# Altium PCB 8button-8neopixel.PcbDoc
Units mil, origin at the board's own origin, x right, y up, seen from the top; angles counter-clockwise.
Board outline 7950 x 3500 mil, 2 copper layers (Top Layer, Bottom Layer); 25 components, 18 nets, 72 pads, 0 vias.
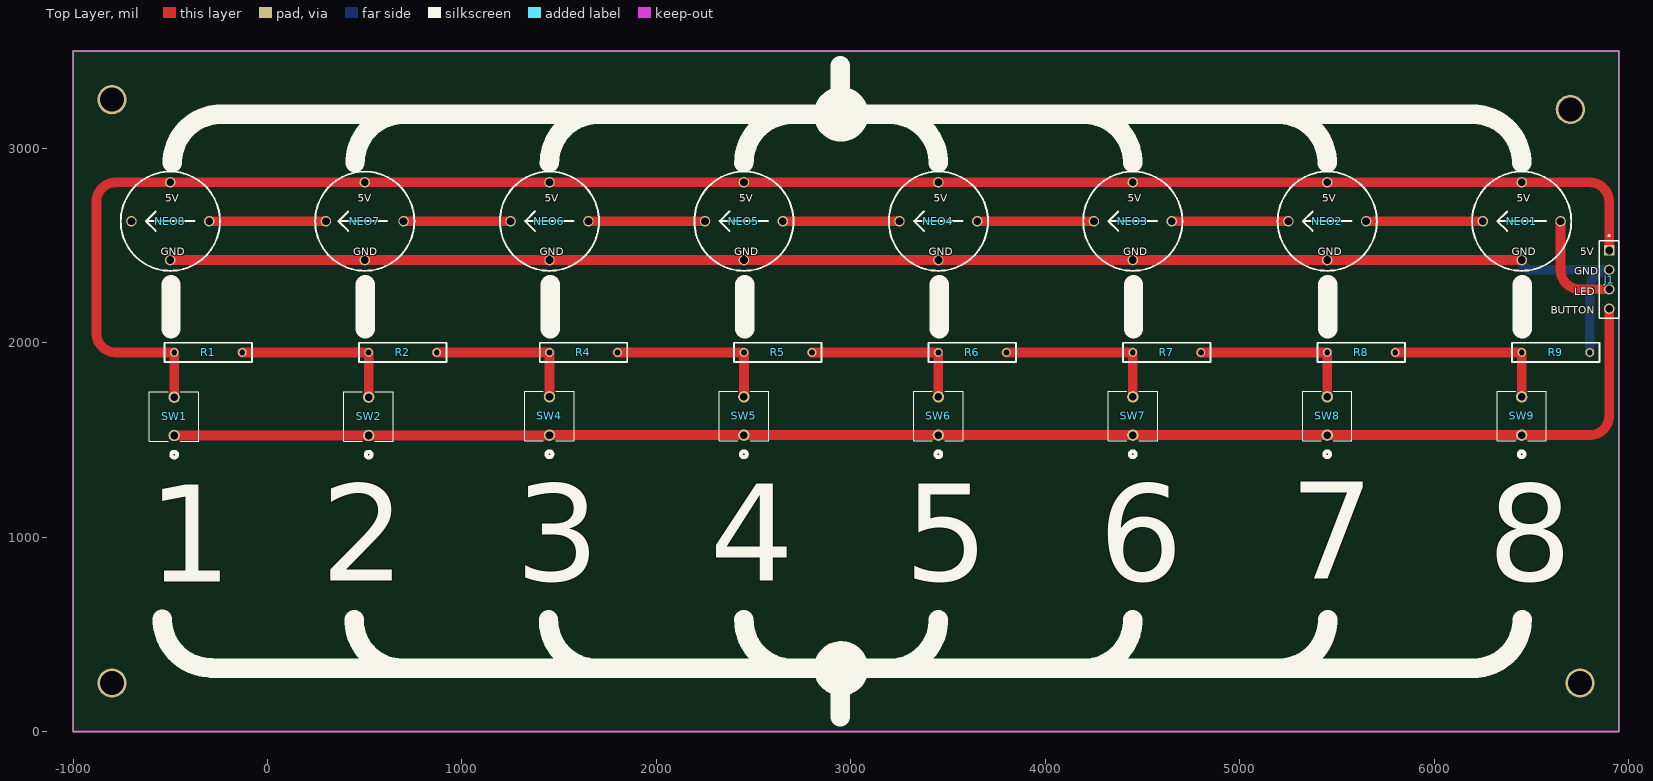
[diagram p0: Top Layer view]
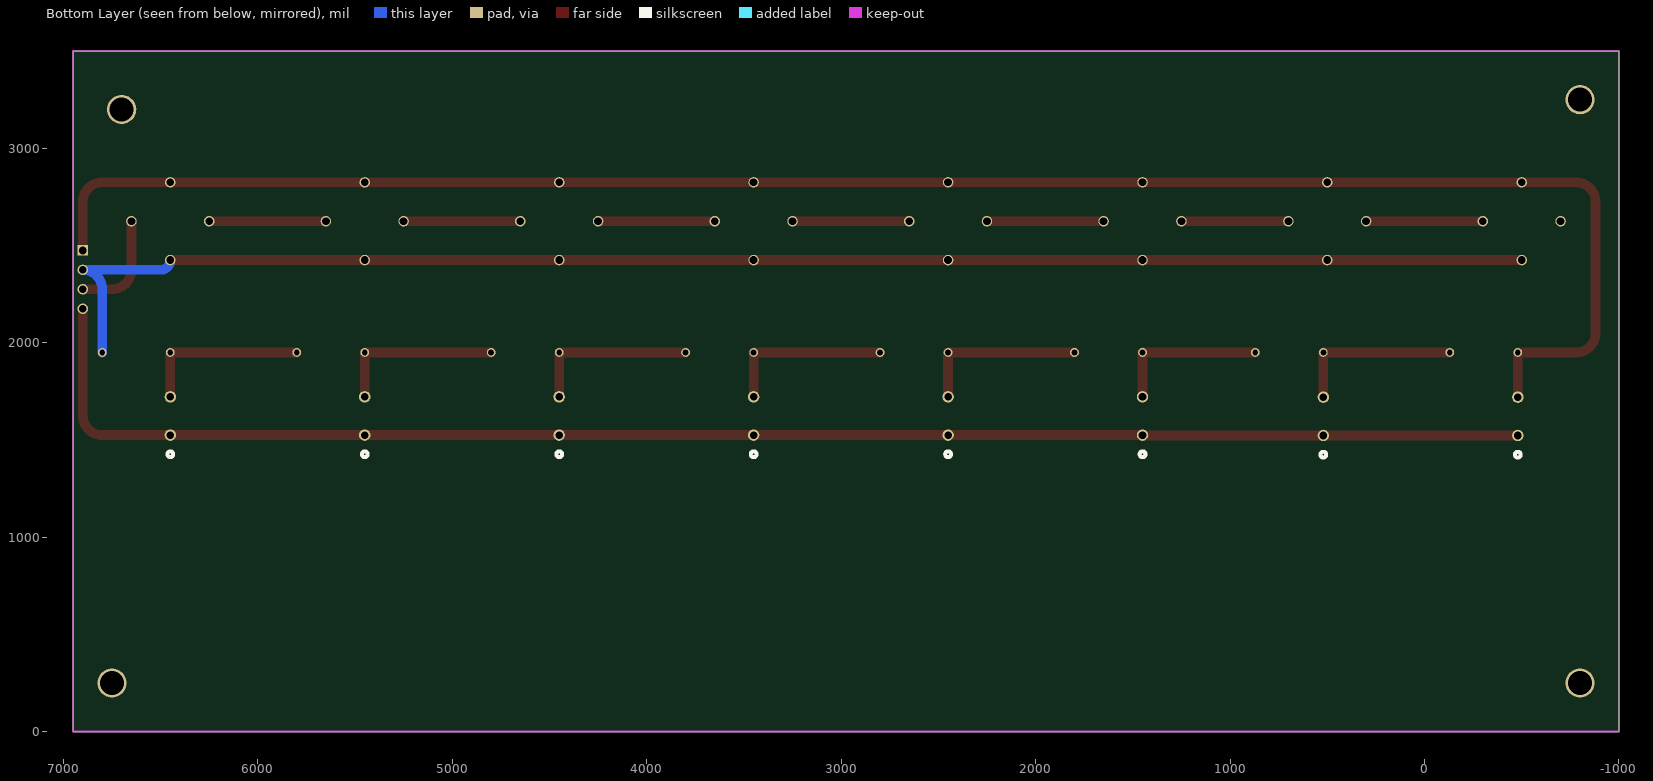
[diagram p1: Bottom Layer view, seen from below]
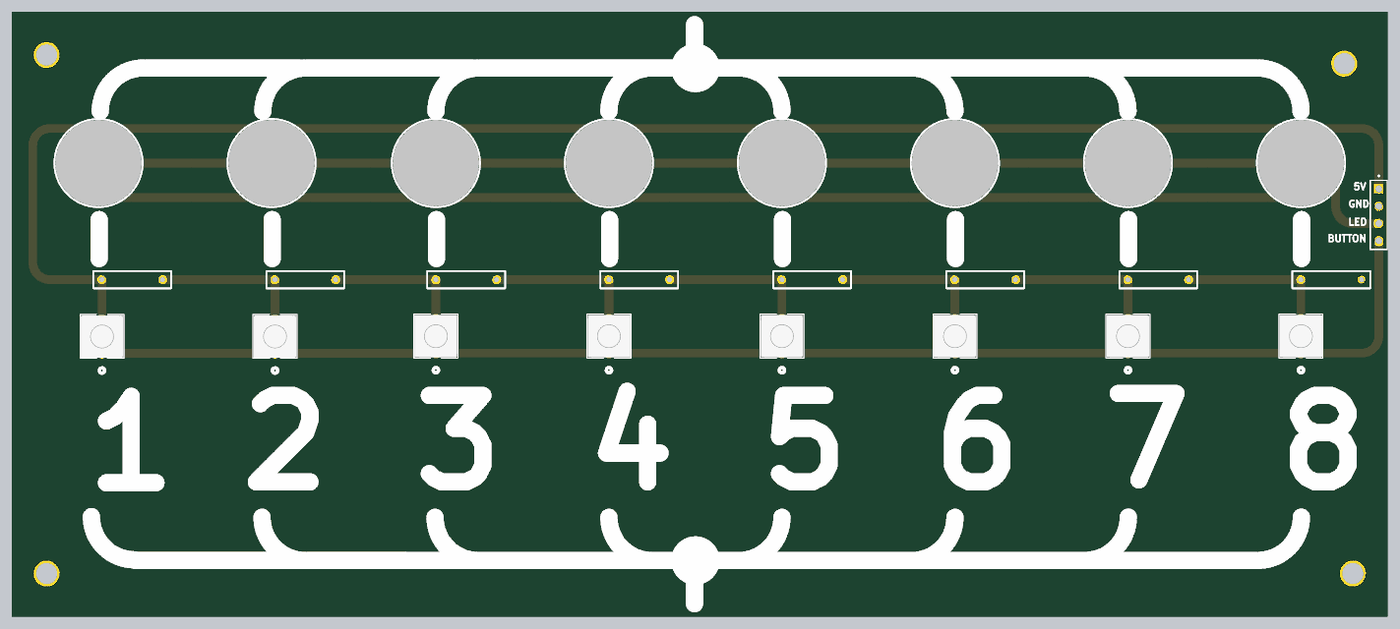
[diagram p2: 3D render of the assembled board from above, using the file's embedded part models]

## Layer stack, top to bottom
Top Solder: solder mask 0.4, Solder Resist, Dk 3.5
Top Layer: signal copper 1.4
Dielectric 1: dielectric 12.6, FR-4, Dk 4.8
Bottom Layer: signal copper 1.4
Bottom Solder: solder mask 0.4, Solder Resist, Dk 3.5

## Board outline
-1000,0 -1000,3500 6950,3500 6950,0

## Design rules (kind name [scope] priority, off if disabled: settings)
Clearance [All] p1: gap=10 ignorepadtopadclearanceinfootprint=FALSE except(0: Arc-Hole Track-Hole SMDPad-Hole THPad-Hole Via-Hole Fill-Hole Poly-Hole Region-Hole Text-Hole)
PolygonConnect [All] p1: connectstyle=Relief reliefconductorwidth=10 reliefentries=4 polygonreliefangle="90 Angle" airgapwidth=10
RoutingVias [All] p1: holewidth=28 width=50 viastyle="Through Hole" minholewidth=28 minwidth=50 maxholewidth=28 maxwidth=50
SolderMaskExpansion [All] p1: expansion=4 istentingtop=FALSE
Width [All] p1: maxlimit=150 minlimit=10 preferedwidth=50 minimp=50.000000 maximp=50.000000 favimp=50.000000
30 further rules are at their usual default settings.

## Components (designator, comment, footprint, x,y, rotation, side; value= is the part's Value field where it differs from the comment)
J1 "TSW-104-07-G-S" SAMTEC_TSW-104-07-G-S 6900,2325 r270 top
NEO1 "adafruit-1559-neopixel-flora" adafruit-1559-neopixel-flora 6450,2625 r0 top
NEO2 "adafruit-1559-neopixel-flora" adafruit-1559-neopixel-flora 5450,2625 r0 top
NEO3 "adafruit-1559-neopixel-flora" adafruit-1559-neopixel-flora 4450,2625 r0 top
NEO4 "adafruit-1559-neopixel-flora" adafruit-1559-neopixel-flora 3450,2625 r0 top
NEO5 "adafruit-1559-neopixel-flora" adafruit-1559-neopixel-flora 2450,2625 r0 top
NEO6 "adafruit-1559-neopixel-flora" adafruit-1559-neopixel-flora 1450,2625 r0 top
NEO7 "adafruit-1559-neopixel-flora" adafruit-1559-neopixel-flora 500,2625 r0 top
NEO8 "adafruit-1559-neopixel-flora" adafruit-1559-neopixel-flora -500,2625 r0 top
R1 "Resistor" "thruhole resistor" -305,1950 r180 top
R2 "Resistor" "thruhole resistor" 695,1950 r180 top
R4 "Resistor" "thruhole resistor" 1625,1950 r180 top
R5 "Resistor" "thruhole resistor" 2625,1950 r180 top
R6 "Resistor" "thruhole resistor" 3625,1950 r180 top
R7 "Resistor" "thruhole resistor" 4625,1950 r180 top
R8 "Resistor" "thruhole resistor" 5625,1950 r180 top
R9 "Resistor" "thruhole resistor" 6625,1950 r180 top
SW1 "TL59AF100Q" SW_TL59AF100Q_EWI -480,1523.15 r90 top
SW2 "TL59AF100Q" SW_TL59AF100Q_EWI 520,1523.15 r90 top
SW4 "TL59AF100Q" SW_TL59AF100Q_EWI 1450,1525 r90 top
SW5 "TL59AF100Q" SW_TL59AF100Q_EWI 2450,1525 r90 top
SW6 "TL59AF100Q" SW_TL59AF100Q_EWI 3450,1525 r90 top
SW7 "TL59AF100Q" SW_TL59AF100Q_EWI 4450,1525 r90 top
SW8 "TL59AF100Q" SW_TL59AF100Q_EWI 5450,1525 r90 top
SW9 "TL59AF100Q" SW_TL59AF100Q_EWI 6450,1525 r90 top

## Footprints (in the part's own frame and the unit in brackets; to place one, negate y for a bottom-side part, rotate by r counter-clockwise, add the part's x,y. Pads: shape width x height; smd on the part's side, far side on the other; paste and mask are expansions set on the pad)
adafruit-1559-neopixel-flora [mm]
  round 1.37 hole 1.02: 5V(0,5.08) GND(0,-5.08) IN(5.08,0) OUT(-5.08,0)
  silkscreen extent -6.48,-6.48 6.48,6.48, body extent -6.35,-6.35 6.35,6.35, height 2.4
SAMTEC_TSW-104-07-G-S [mm]
  rect 1.37x1.37 / inner round 1.37 / far side rect 1.37x1.37 hole 1.02: 01(-3.81,0)
  round 1.37 hole 1.02: 02(-1.27,0) 03(1.27,0) 04(3.81,0)
  silkscreen extent -5.83,-1.27 5.08,1.27
SW_TL59AF100Q_EWI [mil]
  round 59 / inner round 60 / far side round 59 hole 39 paste-99999 mask+0: 1(0,0) 2(196.85,0)
  silkscreen extent -114,-127 225,127, body extent -24,-122 220,122, height 202
"thruhole resistor" [mil] "thruhole resistor"
  round 45 hole 30: 1(-175,0) 2(175,0)
  silkscreen extent -225,-50 225,50

## Part data
J1: "<a href=\"https://pricing.snapeda.com/parts/TSW-104-07-G-S/Samtec/view-part?ref=eda\">Check availability</a>", Package=None, Availability=Unavailable, MP=altium_native_batch, Price=None
SW1 SW2 SW4 SW5 SW6 SW7 SW8 SW9: "No Description Available", Mfr_Name=E-Switch, Copyright="Copyright (C) 2024 Ultra Librarian. All rights reserved.", Manufacturer_Part_Number=TL59AF100Q, RefDes=RefDes, Type=DEV

## Free pads (board coordinates)
  round 150 hole 123 unplated: 8(-800,250) 8(-800,3250) 8(6700,3200) 8(6750,250)

## Nets (pads, with @x,y where several pads share a name; then routed paths per layer and width w, separated by ;. In a path a pad name is that pad's centre, name@x,y a point inside that pad or via, vN(x,y) a via of type N, cw(c..) or ccw(c..) an arc to the next point about the centre after c; other vN are vias at no path point)
GND: J1.02 NEO1.GND NEO2.GND NEO3.GND NEO4.GND NEO5.GND NEO6.GND NEO7.GND NEO8.GND R9.1 | length 7910.6
  Top Layer w50: NEO8.GND NEO7.GND NEO6.GND NEO5.GND NEO4.GND NEO3.GND NEO2.GND NEO1.GND
  Bottom Layer w50: NEO1.GND ccw(c6500,2425) 6500,2375 J1.02 ccw(c6900,2275) 6800,2275 R9.1
NetJ1_01: J1.01 NEO1.5V NEO2.5V NEO3.5V NEO4.5V NEO5.5V NEO6.5V NEO7.5V NEO8.5V R1.2 SW1.2 | length 9506.2
  Top Layer w50: SW1.2 R1.2 -780,1950 cw(c-780,2050) -880,2050 -880,2725 cw(c-780,2725) -780,2825 NEO8.5V NEO7.5V NEO6.5V NEO5.5V NEO4.5V NEO3.5V NEO2.5V NEO1.5V 6800,2825 cw(c6800,2725) 6900,2725 J1.01
NetJ1_03: J1.03 NEO1.IN | length 557.1
  Top Layer w50: NEO1.IN 6650,2375 ccw(c6750,2375) 6750,2275 J1.03
NetJ1_04: J1.04 SW1.1 SW2.1 SW4.1 SW5.1 SW6.1 SW7.1 SW8.1 SW9.1 | length 7988.1
  Top Layer w50: SW1.1 SW2.1 1448.15,1523.15 ccw(c1448.15,1525) SW4.1 SW5.1 SW6.1 SW7.1 SW8.1 SW9.1 6800,1525 ccw(c6800,1625) 6900,1625 J1.04
NetNEO1_OUT: NEO1.OUT NEO2.IN | length 600
  Top Layer w50: NEO2.IN NEO1.OUT
NetNEO2_OUT: NEO2.OUT NEO3.IN | length 600
  Top Layer w50: NEO3.IN NEO2.OUT
NetNEO3_OUT: NEO3.OUT NEO4.IN | length 600
  Top Layer w50: NEO4.IN NEO3.OUT
NetNEO4_OUT: NEO4.OUT NEO5.IN | length 600
  Top Layer w50: NEO5.IN NEO4.OUT
NetNEO5_OUT: NEO5.OUT NEO6.IN | length 600
  Top Layer w50: NEO6.IN NEO5.OUT
NetNEO6_OUT: NEO6.OUT NEO7.IN | length 550
  Top Layer w50: NEO7.IN NEO6.OUT
NetNEO7_OUT: NEO7.OUT NEO8.IN | length 600
  Top Layer w50: NEO8.IN NEO7.OUT
NetR1_1: R1.1 R2.2 SW2.2 | length 880
  Top Layer w50: R1.1 R2.2 SW2.2
NetR2_1: R2.1 R4.2 SW4.2 | length 808.1
  Top Layer w50: R2.1 R4.2 SW4.2
NetR4_1: R4.1 R5.2 SW5.2 | length 878.1
  Top Layer w50: R4.1 R5.2 SW5.2
NetR5_1: R5.1 R6.2 SW6.2 | length 878.1
  Top Layer w50: R5.1 R6.2 SW6.2
NetR6_1: R6.1 R7.2 SW7.2 | length 878.1
  Top Layer w50: R6.1 R7.2 SW7.2
NetR7_1: R7.1 R8.2 SW8.2 | length 878.1
  Top Layer w50: R7.1 R8.2 SW8.2
NetR8_1: R8.1 R9.2 SW9.2 | length 878.1
  Top Layer w50: R8.1 6425,1950 R9.2 6450,1900 SW9.2
pads on no net: NEO8.OUT

## Keep-outs
Keep-Out Layer:
  lines w10: 6950,0 -1000,0 -1000,3500 6950,3500 6950,2580 6950,930 6950,5

## Silkscreen, mask and mechanical layers (free items; w line width, h text height)
Top Overlay:
  circle w100: c2950,325 r90.14
  circle w100: c2950,3175 r90.14
  lines w10: -575,2575 -625,2625 ; -575,2675 -625,2625 ; -375,2625 -625,2625 ; 415,2575 365,2625 ; 415,2675 365,2625 ; 615,2625 365,2625 ; 1375,2575 1325,2625 ; 1375,2675 1325,2625 ; 1575,2625 1325,2625 ; 2375,2575 2325,2625 ; 2375,2675 2325,2625 ; 2575,2625 2325,2625 ; 3375,2575 3325,2625 ; 3375,2675 3325,2625 ; 3575,2625 3325,2625 ; 4375,2575 4325,2625 ; 4375,2675 4325,2625 ; 4575,2625 4325,2625 ; 5375,2575 5325,2625 ; 5375,2675 5325,2625 ; 5575,2625 5325,2625 ; 6375,2575 6325,2625 ; 6375,2675 6325,2625 ; 6575,2625 6325,2625
  lines w100: -541.28,579.31 ccw(c-291.28,579.31) -291.28,329.31 ; -496.47,2072.4 -496.47,2297.4 ; -490,2925 cw(c-240,2925) -240,3175 ; -290,325.42 6190,324.98 ; -230,3175 6190,3175 ; 444.94,575.35 ccw(c694.94,575.35) 694.94,325.35 ; 450,2925 cw(c700,2925) 700,3175 ; 503.53,2072.4 503.53,2297.4 ; 1445,575 ccw(c1695,575) 1695,325 ; 1450,2925 cw(c1700,2925) 1700,3175 ; 1453.53,2072.4 1453.53,2297.4 ; 2200,3175 2950,3175 ; 2450,575 ccw(c2700,575) 2700,325 ; 2450,2925 cw(c2700,2925) 2700,3175 ; 2453.53,2072.4 2453.53,2297.4 ; 2944.94,75.35 2944.94,325.35 3694.94,325.35 ; 2944.94,3175.35 2944.94,3425.35 ; 3200,325 ccw(c3200,575) 3450,575 ; 3200,3175 cw(c3200,2925) 3450,2925 ; 3453.53,2072.4 3453.53,2297.4 ; 4200,325 ccw(c4200,575) 4450,575 ; 4200,3175 cw(c4200,2925) 4450,2925 ; 4453.53,2072.4 4453.53,2297.4 ; 5200,3175 cw(c5200,2925) 5450,2925 ; 5202,326 ccw(c5202,576) 5452,576 ; 5453.53,2072.4 5453.53,2297.4 ; 6200,3175 cw(c6200,2925) 6450,2925 ; 6202,326 ccw(c6202,576) 6452,576 ; 6453.53,2072.4 6453.53,2297.4
  text "5V" at -525,2725 h39.37
  text "5V" at 465,2725 h39.37
  text "5V" at 1425,2725 h39.37
  text "5V" at 2425,2725 h39.37
  text "5V" at 3425,2725 h39.37
  text "5V" at 4425,2725 h39.37
  text "5V" at 5425,2725 h39.37
  text "5V" at 6425,2725 h39.37
  text "GND" at -550,2450 h39.37
  text "GND" at 440,2450 h39.37
  text "GND" at 1400,2450 h39.37
  text "GND" at 2400,2450 h39.37
  text "GND" at 3400,2450 h39.37
  text "GND" at 4400,2450 h39.37
  text "GND" at 5400,2450 h39.37
  text "GND" at 6400,2450 h39.37
  text "5V" at 6750,2450 h39.37
  text "GND" at 6720,2350 h39.37
  text "LED" at 6720,2245 h39.37
  text "BUTTON" at 6600,2150 h39.37
  text "7" at 5257.21,786.44 h500
  text "2" at 275,775 h500
  text "3" at 1275,775 h500
  text "4" at 2275,775 h500
  text "5" at 3275,775 h500
  text "6" at 4275,775 h500
  text "8" at 6275,775 h500
  text "1" at -615,770 h500